# Altium PCB PCB_RB2_My.PcbDoc (part 1 of 2)
Units mm, origin at the board's own origin, x right, y up, seen from the top; angles counter-clockwise.
Board outline 198 x 170 mm, 2 copper layers (Top, Bottom); 107 components, 89 nets, 429 pads, 145 vias.
Unrouted connection lines stored in the file: 100.
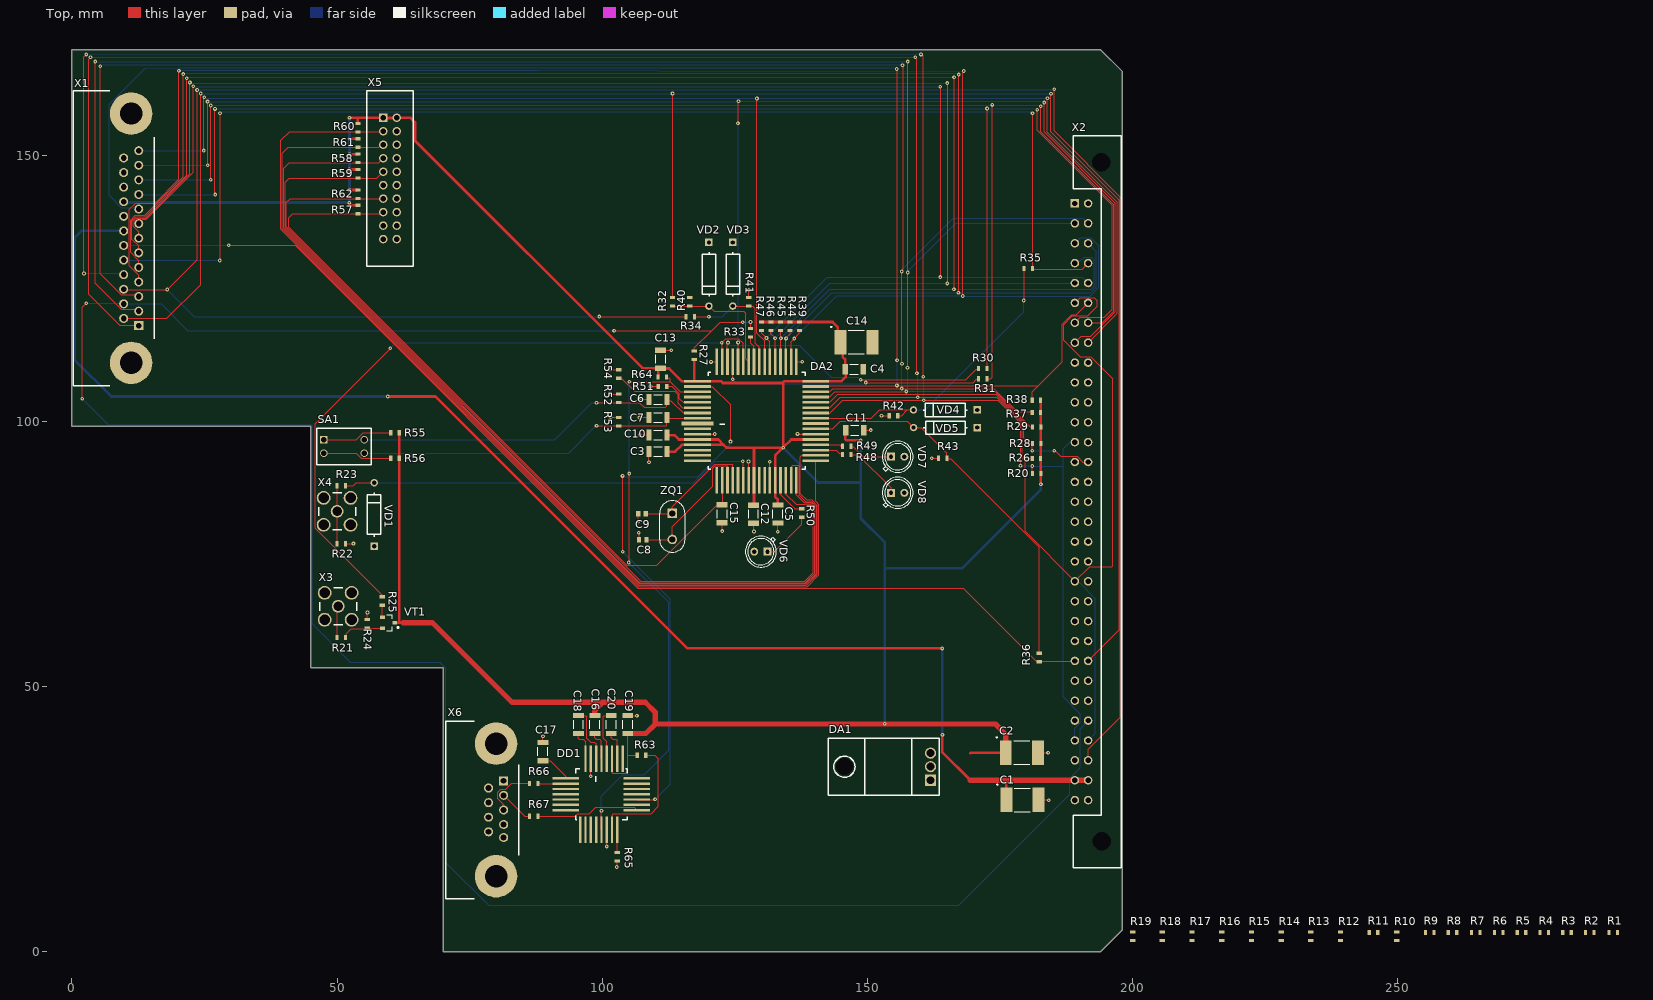
[diagram p0: Top view]
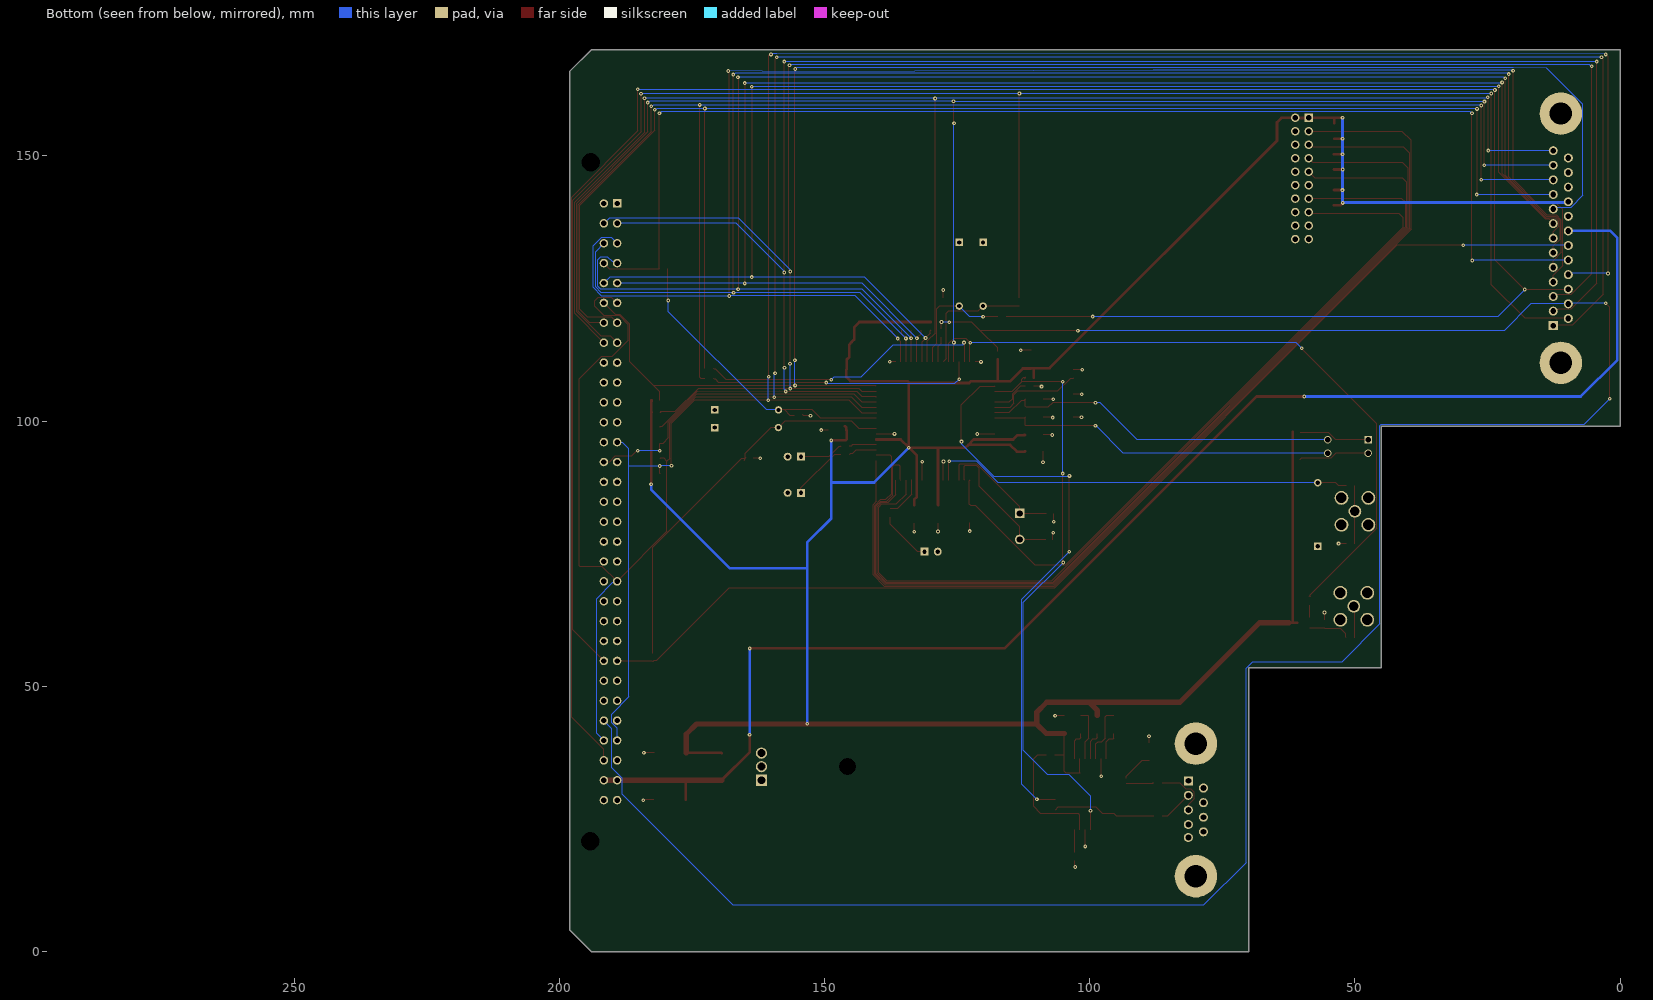
[diagram p1: Bottom view, seen from below]

## Layer stack, top to bottom
Top Solder: solder mask 0.0102, Solder Resist, Dk 3.5
Top: signal copper 0.0356
Dielectric 1: dielectric 0.32, FR-4, Dk 4.8
Bottom: signal copper 0.0356
Bottom Solder: solder mask 0.0102, Solder Resist, Dk 3.5

## Board outline
70,0 70,53.5 45,53.5 45,99 0,99 0,170 194,170 198,166 198,4 194,0

## Design rules (kind name [scope] priority, off if disabled: settings)
AcuteAngle [All] p1: minimum=3.50000000000000E+0001 checktracksonly=FALSE
BoardOutlineClearance "BoardOutlineClearance Fres ExtLayer" [OnTopLayer or OnBottomLayer] p1: gap=0.25 ignorepadtopadclearanceinfootprint=FALSE except(0: Arc-SplitContinuation Track-SplitContinuation SMDPad-SplitContinuation THPad-SplitContinuation Via-SplitContinuation Fill-SplitContinuation Poly-SplitContinuation Region-SplitContinuation Text-SplitContinuation) // Milling
BoardOutlineClearance "BoardOutlineClearance Fres IntLayer" [(OnMid        or OnMultiLayer) and not IsKeepOut] p2: gap=0.5 ignorepadtopadclearanceinfootprint=FALSE except(0: Arc-SplitContinuation Track-SplitContinuation SMDPad-SplitContinuation THPad-SplitContinuation Via-SplitContinuation Fill-SplitContinuation Poly-SplitContinuation Region-SplitContinuation Text-SplitContinuation) // Milling
Clearance "Clearance connector" [All vs HasFootprint('СНП347-20ВП22-В') and HasFootprint('СНП268-25РП32-1-4-В') and HasFootprint('СНП268-9ВП32-1-4-В') and HasFootprint('ГРПМ9-62ШУ2-В') and HasFootprint('HYR-1149') and HasFootprint('DS1040-02RN')] p1: gap=1.6 ignorepadtopadclearanceinfootprint=FALSE except(0: Arc-Arc Arc-Track Track-Track)
Clearance "Clearance Cap" [HasFootprint('CAPC3419X15N(1206)')] p2: gap=0 ignorepadtopadclearanceinfootprint=TRUE except(0.8: SMDPad-SMDPad)
Clearance "Clearance KeepOut" [IsKeepOut] p3: gap=0 ignorepadtopadclearanceinfootprint=TRUE // Standart
Clearance "Clearance Sdt Via" [(IsPad and not    InPadClass('ThermoPads')) or IsVia vs (IsPad and not    InPadClass('ThermoPads')) or IsVia] p4: gap=0 ignorepadtopadclearanceinfootprint=TRUE except(0.125: SMDPad-THPad SMDPad-Via THPad-THPad THPad-Via Via-Via) // Standart
Clearance "Clearance Sdt Via_Int" [OnMid vs isvia    or IsPad] p5: gap=0.25 ignorepadtopadclearanceinfootprint=TRUE // Standart
Clearance "Clearance Sdt" [All] p6: gap=0.125 ignorepadtopadclearanceinfootprint=TRUE except(0.2: Arc-Fill Arc-Poly Track-Fill Track-Poly SMDPad-SMDPad SMDPad-Fill SMDPad-Poly THPad-Fill THPad-Poly Via-Fill Via-Poly Fill-Fill Fill-Poly Poly-Poly Poly-Region Poly-Text; 0.25: Arc-Hole Track-Hole SMDPad-Hole THPad-Hole Via-Hole Fill-Hole Poly-Hole Region-Hole Text-Hole) // Standart
ComponentClearance ComponentClearance_TP [ParameterValue('ClassName')='TP'] p1: gap=-5 collisioncheckmode=3 verticalgap=0 showdistances=FALSE
ComponentClearance ComponentClearance_SMT [ParameterValue('ClassName')='SMT'] p2: gap=0.99 collisioncheckmode=3 verticalgap=0 showdistances=FALSE
ComponentClearance ComponentClearance_CHIP_L [ParameterValue('ClassName')='CHIP_L'] p3: gap=0.8 collisioncheckmode=3 verticalgap=0 showdistances=FALSE
ComponentClearance ComponentClearance_CHIP [ParameterValue('ClassName')='CHIP' vs ParameterValue('ClassName')<>'TH'] p4: gap=0.59 collisioncheckmode=3 verticalgap=0 showdistances=FALSE
DiffPairsRouting "DiffPairsRouting 1 Oz" [All] p1: maxlimit=0.5 minlimit=0.125 mostfreqgap=0.3 toplayer_minwidth=0.125 toplayer_maxwidth=0.5 toplayer_prefwidth=0.2 bottomlayer_minwidth=0.125 bottomlayer_maxwidth=0.5 bottomlayer_prefwidth=0.2 maxuncoupledlength=12.7
HoleSize "Minimum HoleSize" [IsPad] p1: absolutevalues=TRUE maxlimit=5.9 minlimit=0.6 maxpercent=80.000 minpercent=20.000
HoleSize "Minimum HoleSize VIA 1" [IsVia] p2: absolutevalues=TRUE maxlimit=5.9 minlimit=0.3 maxpercent=80.000 minpercent=20.000 // Standart
HoleSize "Minimum HoleSize VIA 2" [IsVia] p3: absolutevalues=TRUE maxlimit=5.9 minlimit=0.2 maxpercent=80.000 minpercent=20.000 // Advance
HoleToHoleClearance Hole2HoleClearance [All] p1: gap=0.25 allowstackedmicrovias=FALSE
MinimumAnnularRing "Minimum AR VIA Standart" [All] p1: minimumring=0.15
MinimumAnnularRing "Minimum AR PAD Standart" [All] p2: minimumring=0.2
MinimumSolderMaskSliver "SolderMask Bridge Standart" [All] p1: minsoldermaskwidth=0.15 // All Masks
PlaneClearance "PlaneClearance Std" [All] p1: clearance=0.2 // Standart
PlaneConnect "TermalConnect Std" [All] p1: pad.planeconnectstyle=Relief pad.reliefexpansion=0.2 pad.reliefentries=4 pad.reliefconductorwidth=0.3 pad.reliefairgap=0.2 via.planeconnectstyle=Direct via.reliefexpansion=0.2 via.reliefentries=4 via.reliefconductorwidth=0.2 via.reliefairgap=0.2 // Standart
PolygonConnect "PolygonConnect Direct" [InPadClass('DirectConnection')] p1: connectstyle=Direct reliefconductorwidth=0.15 reliefentries=4 polygonreliefangle="90 Angle" airgapwidth=0.2 // Standart
PolygonConnect "PolygonConnect Std_Int" [OnMid] p2: thpad.connectstyle=Relief thpad.reliefconductorwidth=0.2 thpad.reliefentries=4 thpad.polygonreliefangle="90 Angle" thpad.airgapwidth=0.25 smdpad.connectstyle=Relief smdpad.reliefconductorwidth=0.2 smdpad.reliefentries=4 smdpad.polygonreliefangle="90 Angle" smdpad.airgapwidth=0.2 via.connectstyle=Direct via.reliefconductorwidth=0.254 via.reliefentries=4 via.polygonreliefangle="90 Angle" via.airgapwidth=0.254 // Standart
PolygonConnect "PolygonConnect Std" [All] p3: thpad.connectstyle=Relief thpad.reliefconductorwidth=0.2 thpad.reliefentries=4 thpad.polygonreliefangle="90 Angle" thpad.airgapwidth=0.2 smdpad.connectstyle=Relief smdpad.reliefconductorwidth=0.2 smdpad.reliefentries=4 smdpad.polygonreliefangle="90 Angle" smdpad.airgapwidth=0.2 via.connectstyle=Direct via.reliefconductorwidth=0.254 via.reliefentries=4 via.polygonreliefangle="90 Angle" via.airgapwidth=0.254 // Standart
RoomDefinition RB2_My [InComponentClass('RB2_My')] p1: confinementstyle=ConfineIn formatcopy=TRUE lockcomponents=FALSE outline 199.1,1.4 292.099,1.4 292.099,7 199.1,7
RoutingCorners [All] p1 off: cornerstyle=45-Degree minsetback=2.54 maxsetback=2.54
RoutingVias [All] p1: holewidth=0.3 width=0.7 viastyle="Through Hole" minholewidth=0.3 minwidth=0.7 maxholewidth=0.6 maxwidth=1.1 viatemplateguid#1={5BCA8359-3FDF-4503-88DF-982B2CC54C6B} viatemplatename#1=v60h30m0mx0(Tol0-10)
SMDEntry [not InPadClass('ThermoPads')] p1: side=TRUE corner=TRUE anyangle=FALSE
SilkToSilkClearance Silk2SilkClearance [All] p1: silktosilkclearance=0.15
SilkToSolderMaskClearance Silk2SolderMaskClearance [IsPad] p1: minsilkscreentomaskgap=0.15 clearancetoexposedcopper=FALSE
SolderMaskExpansion "SolderMaskExpansion Std" [All] p1: expansion=0.05 istentingtop=FALSE // Standart
UnRoutedNet [All] p1: checkbadconnections=TRUE
Width "Width Std" [All] p1: maxlimit=10 minlimit=0.125 preferedwidth=0.2 checkconnectedcopper=TRUE // Standart
19 further rules are at their usual default settings.

## Classes and differential pairs
component class RB2_My: C1 C2 C3 C4 C5 C6 C7 C8 C9 C10 C11 C12 C13 C14 C16 C18 C20 DA1 DA2 DD1 R24 R26 R30 R32 R37 R39 R41 R42 R44 R48 R49 R50 R51 R52 R53 R54 R55 R56 R57 R58 R59 R60 R61 R62 R63 R64 R65 R66 R67 SA1 VD1 VD2 VD3 VD4 VD5 VD6 VD7 VD8 VT1 X1 X2 X3 X4 X5 X6 ZQ1

## Components (designator, comment, footprint, x,y, rotation, side; value= is the part's Value field where it differs from the comment)
C1 "К53-65-16В-100мкФАЖЯР.673546.004ТУ" Chip2PinSM127P600-8N(E) 179.2,28.6 r0 top value=100мк
C2 "К53-65-16В-100мкФАЖЯР.673546.004ТУ" Chip2PinSM127P600-8N(E) 179.1,37.5 r0 top value=100мк
C3 "К10-17в-Н90-0,1мкФ-3ОЖО.460.107ТУ" CAPC3419X15N(1206) 110.5,94.3 r180 top value=0,1мк
C4 "К10-17в-Н90-0,1мкФ-3ОЖО.460.107ТУ" CAPC3419X15N(1206) 147.5,109.8 r0 top value=0,1мк
C5 "К10-17в-Н90-0,1мкФ-3ОЖО.460.107ТУ" CAPC3419X15N(1206) 133.1,82.5 r270 top value=0,1мк
C6 "К10-17в-Н90-0,1мкФ-3ОЖО.460.107ТУ" CAPC3419X15N(1206) 110.5,104.1 r0 top value=0,1мк
C7 "К10-17в-Н90-0,1мкФ-3ОЖО.460.107ТУ" CAPC3419X15N(1206) 110.5,100.7 r0 top value=0,1мк
C8 "К10-17в-МПО-22Ф10%-1ОЖО.460.107ТУ" "CAPC1608X09N (0603)" 107.625,77.65 r180 top value=22
C9 "К10-17в-МПО-22Ф10%-1ОЖО.460.107ТУ" "CAPC1608X09N (0603)" 107.5,82.575 r180 top value=22
C10 "К10-17в-Н90-0,1мкФ-3ОЖО.460.107ТУ" CAPC3419X15N(1206) 110.5,97.4 r180 top value=0,1мк
C11 "К10-17в-Н90-0,1мкФ-3ОЖО.460.107ТУ" CAPC3419X15N(1206) 147.6,98.3 r0 top value=0,1мк
C12 "К10-17в-Н90-0,1мкФ-3ОЖО.460.107ТУ" CAPC3419X15N(1206) 128.525,82.475 r270 top value=0,1мк
C13 "К10-17в-Н90-0,1мкФ-3ОЖО.460.107ТУ" CAPC3419X15N(1206) 111,111.7 r90 top value=0,1мк
C14 "К53-65-16В-100мкФАЖЯР.673546.004ТУ" Chip2PinSM127P600-8N(E) 147.9,114.9 r0 top value=100мк
C15 "К10-17в-Н90-0,1мкФ-3ОЖО.460.107ТУ" CAPC3419X15N(1206) 122.601,82.541 r270 top value=0,1мк
C16 "К10-17в-Н30-0,22мкФ-3ОЖО.460.107ТУ" CAPC3419X15N(1206) 98.6,42.8 r90 top value=0,22мк
C17 "К10-17в-Н30-0,22мкФ-3ОЖО.460.107ТУ" CAPC3419X15N(1206) 88.8,37.7 r270 top value=0,22мк
C18 "К10-17в-Н30-0,22мкФ-3ОЖО.460.107ТУ" CAPC3419X15N(1206) 95.5,42.8 r270 top value=0,22мк
C19 "К10-17в-Н30-0,22мкФ-3ОЖО.460.107ТУ" CAPC3419X15N(1206) 104.8,42.8 r270 top value=0,22мк
C20 "К10-17в-Н30-0,22мкФ-3ОЖО.460.107ТУ" CAPC3419X15N(1206) 101.7,42.8 r270 top value=0,22мк
DA1 "1303ЕН3.3П" КТ-28А-2.01 169.4,32.3 r90 top
DA2 "1986ВЕ92У" 1986ВЕ92У 121.6,88.9 r0 top
DD1 "5559ИН4У" 5559ИН4У 98.8,36.3 r270 top
R1 "Р1-12-0,1-05%" "RESC1608X05N (0603)" 290.599,3.6 r0 top value=0
R2 "Р1-12-0,1-05%" "RESC1608X05N (0603)" 286.199,3.6 r0 top value=0
R3 "Р1-12-0,1-05%" "RESC1608X05N (0603)" 281.899,3.6 r0 top value=0
R4 "Р1-12-0,1-05%" "RESC1608X05N (0603)" 277.599,3.6 r0 top value=0
R5 "Р1-12-0,1-05%" "RESC1608X05N (0603)" 273.299,3.6 r0 top value=0
R6 "Р1-12-0,1-05%" "RESC1608X05N (0603)" 268.999,3.6 r0 top value=0
R7 "Р1-12-0,1-05%" "RESC1608X05N (0603)" 264.699,3.6 r0 top value=0
R8 "Р1-12-0,1-05%" "RESC1608X05N (0603)" 260.299,3.6 r0 top value=0
R9 "Р1-12-0,1-05%" "RESC1608X05N (0603)" 255.999,3.6 r0 top value=0
R10 "Р1-12-0,1-05%" "RESC1608X05N (0603)" 249.799,2.9 r90 top value=0
R11 "Р1-12-0,1-05%" "RESC1608X05N (0603)" 245.399,3.6 r0 top value=0
R12 "Р1-12-0,1-05%" "RESC1608X05N (0603)" 239.199,2.9 r90 top value=0
R13 "Р1-12-0,1-05%" "RESC1608X05N (0603)" 233.599,2.9 r90 top value=0
R14 "Р1-12-0,1-05%" "RESC1608X05N (0603)" 227.999,2.9 r90 top value=0
R15 "Р1-12-0,1-05%" "RESC1608X05N (0603)" 222.4,2.9 r90 top value=0
R16 "Р1-12-0,1-05%" "RESC1608X05N (0603)" 216.8,2.9 r90 top value=0
R17 "Р1-12-0,1-05%" "RESC1608X05N (0603)" 211.2,2.9 r90 top value=0
R18 "Р1-12-0,1-05%" "RESC1608X05N (0603)" 205.6,2.9 r90 top value=0
R19 "Р1-12-0,1-05%" "RESC1608X05N (0603)" 200,2.9 r90 top value=0
R20 "Р1-12-0,125-10кОм5%" "RESC1608X05N (0603)" 181.9,90.125 r0 top value=10к
R21 "Р1-12-0,1-05%" "RESC1608X05N (0603)" 50.8,59.2 r0 top value=0
R22 "Р1-12-0,1-505%" "RESC1608X05N (0603)" 50.8,76.9 r180 top value=50
R23 "Р1-12-0,125-1к5%" "RESC1608X05N (0603)" 50.8,87.8 r0 top value=1к
R24 "Р1-12-0,125-560Ом5%" "RESC1608X05N (0603)" 55.7,61.8 r270 top value=560
R25 "Р1-12-0,125-560Ом5%" "RESC1608X05N (0603)" 58.5,66.1 r270 top value=560
R26 "Р1-12-0,125-10кОм5%" "RESC1608X05N (0603)" 181.85,92.95 r0 top value=10к
R27 "Р1-12-0,1-0,155%" "RESC1608X05N (0603)" 117.325,112.425 r270 top value=0,15
R28 "Р1-12-0,125-10кОм5%" "RESC1608X05N (0603)" 181.9,95.775 r0 top value=10к
R29 "Р1-12-0,125-10кОм5%" "RESC1608X05N (0603)" 181.9,98.9 r0 top value=10к
R30 "Р1-12-0,1-0,155%" "RESC1608X05N (0603)" 171.75,109.925 r180 top value=0,15
R31 "Р1-12-0,1-0,155%" "RESC1608X05N (0603)" 171.75,107.975 r180 top value=0,15
R32 "Р1-12-0,1-1,8кОм5%" "RESC1608X05N (0603)" 113.25,122.5 r270 top value=1,8к
R33 "Р1-12-0,1-0,155%" "RESC1608X05N (0603)" 127.95,116.65 r270 top value=0,15
R34 "Р1-12-0,1-1кОм5%" "RESC1608X05N (0603)" 116.575,119.7 r0 top value=1к
R35 "Р1-12-0,1-1,8кОм5%" "RESC1608X05N (0603)" 180.325,128.775 r180 top value=1,8к
R36 "Р1-12-0,1-1,8кОм5%" "RESC1608X05N (0603)" 182.375,55.45 r90 top value=1,8к
R37 "Р1-12-0,125-10кОм5%" "RESC1608X05N (0603)" 181.85,101.625 r0 top value=10к
R38 "Р1-12-0,125-10кОм5%" "RESC1608X05N (0603)" 181.85,103.95 r0 top value=10к
R39 "Р1-12-0,125-10кОм5%" "RESC1608X05N (0603)" 137.2,117.9 r90 top value=10к
R40 "Р1-12-0,125-2705%" "RESC1608X05N (0603)" 116.5,122.5 r90 top value=270
R41 "Р1-12-0,125-2705%" "RESC1608X05N (0603)" 127.6,122.5 r90 top value=270
R42 "Р1-12-0,125-2705%" "RESC1608X05N (0603)" 154.9,101.05 r180 top value=270
R43 "Р1-12-0,125-2705%" "RESC1608X05N (0603)" 164.2,93 r180 top value=270
R44 "Р1-12-0,125-10кОм5%" "RESC1608X05N (0603)" 135.4,117.9 r90 top value=10к
R45 "Р1-12-0,125-10кОм5%" "RESC1608X05N (0603)" 133.6,117.9 r90 top value=10к
R46 "Р1-12-0,125-10кОм5%" "RESC1608X05N (0603)" 131.8,117.9 r90 top value=10к
R47 "Р1-12-0,125-10кОм5%" "RESC1608X05N (0603)" 130,117.9 r90 top value=10к
R48 "Р1-12-0,125-1к5%" "RESC1608X05N (0603)" 146.1,93.7 r0 top value=1к
R49 "Р1-12-0,125-1к5%" "RESC1608X05N (0603)" 146.1,95.3 r0 top value=1к
R50 "Р1-12-0,125-1к5%" "RESC1608X05N (0603)" 137.6,82.7 r270 top value=1к
R51 "Р1-12-0,125-0,155%" "RESC1608X05N (0603)" 111.35,106.55 r0 top value=0,15
R52 "Р1-12-0,125-10кОм5%" "RESC1608X05N (0603)" 103.1,104.3 r270 top value=10к
R53 "Р1-12-0,125-10кОм5%" "RESC1608X05N (0603)" 103.1,99.9 r270 top value=10к
R54 "Р1-12-0,125-10кОм5%" "RESC1608X05N (0603)" 103.1,108.9 r90 top value=10к
R55 "Р1-12-0,125-10кОм5%" "RESC1608X05N (0603)" 60.9,97.8 r0 top value=10к
R56 "Р1-12-0,125-10кОм5%" "RESC1608X05N (0603)" 60.9,93 r0 top value=10к
R57 "Р1-12-0,125-10кОм5%" "RESC1608X05N (0603)" 53.95,139.9 r270 top value=10к
R58 "Р1-12-0,125-10кОм5%" "RESC1608X05N (0603)" 53.95,149.55 r270 top value=10к
R59 "Р1-12-0,125-10кОм5%" "RESC1608X05N (0603)" 53.95,146.65 r270 top value=10к
R60 "Р1-12-0,125-10кОм5%" "RESC1608X05N (0603)" 53.925,155.35 r270 top value=10к
R61 "Р1-12-0,125-10кОм5%" "RESC1608X05N (0603)" 53.925,152.45 r270 top value=10к
R62 "Р1-12-0,125-10кОм5%" "RESC1608X05N (0603)" 53.95,142.775 r270 top value=10к
R63 "Р1-12-0,125-10кОм5%" "RESC1608X05N (0603)" 107.4,37 r0 top value=10к
R64 "Р1-12-0,125-10кОм5%" "RESC1608X05N (0603)" 111.325,108.325 r180 top value=10к
R65 "Р1-12-0,1-0,155%" "RESC1608X05N (0603)" 102.8,17.9 r90 top value=0,15
R66 "Р1-12-0,1-0,155%" "RESC1608X05N (0603)" 87.1,31.7 r180 top value=0,15
R67 "Р1-12-0,1-0,155%" "RESC1608X05N (0603)" 87.1,25.5 r180 top value=0,15
SA1 "DS1040-02RN" DS1040-02RN 47.5,96.5 r270 top
VD1 "2С133аА0.339.092ТУ" 2С127Д-1 57,76.4 r90 top
VD2 "2С133аА0.339.092ТУ" 2С127Д-1 120.1,133.7 r270 top
VD3 "2С133аА0.339.092ТУ" 2С127Д-1 124.6,133.7 r270 top
VD4 "2С133аА0.339.092ТУ" 2С127Д-1 170.675,102.125 r180 top
VD5 "2С133аА0.339.092ТУ" 2С127Д-1 170.7,98.8 r180 top
VD6 "3Л341БаА0.339.189ТУ" 3Л341Б 129.9,75.4 r180 top
VD7 "3Л341БаА0.339.189ТУ" 3Л341Б 155.7,93.3 r0 top
VD8 "3Л341БаА0.339.189ТУ" 3Л341Б 155.7,86.5 r0 top
VT1 "2Т368А9аА0.339.092ТУ" "SOT100P230X95-3N (2T368A9)" 59.7,62 r0 top
X1 "СНП268-25РП32-1-3-В" СНП268-25РП32-1-4-В 12.6,118 r270 top
X2 "ГРПМ9-62ШУ2-В" ГРПМ9-62ШУ2-В 188.8,153.8 r90 top
X3 "HYR-1149" HYR-1149 50.2,65.1 r0 top
X4 "HYR-1149" HYR-1149 50,83 r0 top
X5 "СНП347-20ВП32-В" СНП347-20ВП22-В 58.7,157.2 r270 top
X6 "СНП268-9ВП32-1-3-В" СНП268-9ВП32-1-4-В 81.4,32.2 r270 top
ZQ1 "РК386-П-8ДТ-8000КТУ6321-004-07614320-96" РК456 113.2,82.6 r270 top value=8М

## Footprints (in the part's own frame and the unit in brackets; to place one, negate y for a bottom-side part, rotate by r counter-clockwise, add the part's x,y. Pads: shape width x height; smd on the part's side, far side on the other; paste and mask are expansions set on the pad)
2С127Д-1 [mm]
  rect 1.4x1.4 hole 0.8: 1(0,0)
  round 1.4 hole 0.8: 2(12,0)
  silkscreen extent 1.85,-1.23 10.15,1.27
3Л341Б [mm]
  rect 1.5x1.5 hole 0.8: 1(-1.25,0)
  round 1.5 hole 0.8: 2(1.25,0)
  silkscreen extent -2.92,-2.92 2.92,2.92
1986ВЕ92У [mm]
  rect 6x0.7 smd: 1(-3.65,10.65)
  rect 5x0.5 smd: 2(-3.65,9.65) 3(-3.65,8.65) 4(-3.65,7.65) 5(-3.65,6.65) 6(-3.65,5.65) 7(-3.65,4.65) 8(-3.65,3.65) 25(18.65,3.65) 26(18.65,4.65) 27(18.65,5.65) 28(18.65,6.65) 29(18.65,7.65) 30(18.65,8.65) 31(18.65,9.65) 32(18.65,10.65) 33(18.65,11.65) 34(18.65,12.65) 35(18.65,13.65) 36(18.65,14.65) 37(18.65,15.65) 38(18.65,16.65) 39(18.65,17.65) 40(18.65,18.65) 57(-3.65,18.65) 58(-3.65,17.65) 59(-3.65,16.65) 60(-3.65,15.65) 61(-3.65,14.65) 62(-3.65,13.65) 63(-3.65,12.65) 64(-3.65,11.65)
  rect 0.5x5 smd: 9(0,0) 10(1,0) 11(2,0) 12(3,0) 13(4,0) 14(5,0) 15(6,0) 16(7,0) 17(8,0) 18(9,0) 19(10,0) 20(11,0) 21(12,0) 22(13,0) 23(14,0) 24(15,0) 41(15,22.3) 42(14,22.3) 43(13,22.3) 44(12,22.3) 45(11,22.3) 46(10,22.3) 47(9,22.3) 48(8,22.3) 49(7,22.3) 50(6,22.3) 51(5,22.3) 52(4,22.3) 53(3,22.3) 54(2,22.3) 55(1,22.3) 56(0,22.3)
  silkscreen extent -1.65,2 16.65,20.3
5559ИН4У [mm]
  rect 5x0.45 smd: 1(-0.05,0.04) 2(-0.05,-0.96) 3(-0.05,-1.96) 11(13.33,-1.96) 12(13.33,-0.96) 13(13.33,0.04) 14(13.33,1.04) 15(13.33,2.04) 16(13.33,3.04) 17(13.33,4.04) 25(-0.05,4.04) 26(-0.05,3.04) 27(-0.05,2.04) 28(-0.05,1.04) 29(-0.05,5.04) 30(13.33,-2.96)
  rect 0.45x5 smd: 4(3.64,-5.65) 5(4.64,-5.65) 6(5.64,-5.65) 7(6.64,-5.65) 8(7.64,-5.65) 9(8.64,-5.65) 10(9.64,-5.65) 18(9.64,7.73) 19(8.64,7.73) 20(7.64,7.73) 21(6.64,7.73) 22(5.64,7.73) 23(4.64,7.73) 24(3.64,7.73)
  silkscreen extent 1.8,-3.8 11.48,5.87
"CAPC1608X09N (0603)" [mm] "Chip Capacitor, 2-Leads, Body 1.60x0.80mm, IPC Medium Density"
  rect 0.8x1 smd: 1(-0.7,0) 2(0.7,0)
  body extent -0.85,-0.45 0.85,0.45, height 0.9
CAPC3419X15N(1206) [mm] "Chip Capacitor, 2-Leads, Body 3,35x1,90mm, IPC Medium Density"
  rect 1x2.05 smd: 1(-1.7,0) 2(1.7,0)
  silkscreen extent -0.8,-0.93 0.8,0.92, body extent -1.85,-1 1.85,1, height 1.5
Chip2PinSM127P600-8N(E) [mm]
  rect 2.25x4.6 smd: 1(-3.025,0) 2(3.025,0)
  silkscreen extent -4.77,-2.2 1.5,2.92, body extent -3.8,-2.3 3.8,2.3, height 4.1
DS1040-02RN [mm]
  rect 1.4x1.4 hole 1: 1(0,0)
  round 1.4 hole 1: 2(0,7.62) 3(2.54,0) 4(2.54,7.62)
  silkscreen extent -2.2,-1.3 4.7,8.9, body extent -2,-1.14 4.54,8.76, height 6.8
HYR-1149 [mm]
  round 2.4 hole 1.8: 1(0,0)
  round 2.6 hole 2: 2(2.54,-2.54) 3(2.54,2.54) 4(-2.54,2.54) 5(-2.54,-2.54)
  silkscreen extent -3.5,-3.5 3.5,3.5
"RESC1608X05N (0603)" [mm] "Chip Resistor, 2-Leads, Body 1.60x0.85mm, IPC Medium Density"
  rect 0.6x1 smd: 1(-0.8,0) 2(0.8,0)
  body extent -0.85,-0.48 0.85,0.48, height 0.45
"SOT100P230X95-3N (2T368A9)" [mm] "SOT23, 3-Leads, Body 2,85x2,30mm, Pitch 1,00mm, IPC Medium Density"
  rect 0.9x0.65 smd: 1(1.15,0) 2(-1.15,1) 3(-1.15,-1)
  silkscreen extent -0.3,-1.55 1.94,1.55, body extent -0.7,-1.52 0.7,1.53, height 0.95
ГРПМ9-62ШУ2-В [mm]
  round 3.2 hole 3.5: 1(-133,-5.35) 2(-5,-5.3)
  rect 1.6x1.6 hole 1: 1A(-12.75,-0.3)
  round 1.6 hole 1: 1B(-12.75,-2.8) 2A(-16.5,-0.3) 2B(-16.5,-2.8) 3A(-20.25,-0.3) 3B(-20.25,-2.8) 4A(-24,-0.3) 4B(-24,-2.8) 5A(-27.75,-0.3) 5B(-27.75,-2.8) 6A(-31.5,-0.3) 6B(-31.5,-2.8) 7A(-35.25,-0.3) 7B(-35.25,-2.8) 8A(-39,-0.3) 8B(-39,-2.8) 9A(-42.75,-0.3) 9B(-42.75,-2.8) 10A(-46.5,-0.3) 10B(-46.5,-2.8) 11A(-50.25,-0.3) 11B(-50.25,-2.8) 12A(-54,-0.3) 12B(-54,-2.8) 13A(-57.75,-0.3) 13B(-57.75,-2.8) 14A(-61.5,-0.3) 14B(-61.5,-2.8) 15A(-65.25,-0.3) 15B(-65.25,-2.8) 16A(-69,-0.3) 16B(-69,-2.8) 17A(-72.75,-0.3) 17B(-72.75,-2.8) 18A(-76.5,-0.3) 18B(-76.5,-2.8) 19A(-80.25,-0.3) 19B(-80.25,-2.8) 20A(-84,-0.3) 20B(-84,-2.8) 21A(-87.75,-0.3) 21B(-87.75,-2.8) 22A(-91.5,-0.3) 22B(-91.5,-2.8) 23A(-95.25,-0.3) 23B(-95.25,-2.8) 24A(-99,-0.3) 24B(-99,-2.8) 25A(-102.75,-0.3) 25B(-102.75,-2.8) 26A(-106.5,-0.3) 26B(-106.5,-2.8) 27A(-110.25,-0.3) 27B(-110.25,-2.8) 28A(-114,-0.3) 28B(-114,-2.8) 29A(-117.75,-0.3) 29B(-117.75,-2.8) 30A(-121.5,-0.3) 30B(-121.5,-2.8) 31A(-125.25,-0.3) 31B(-125.25,-2.8)
  silkscreen extent -138,-9 0,0
КТ-28А-2.01 [mm]
  rect 2.1x2.1 hole 1.5: 1(0,7.5)
  round 2.1 hole 1.5: 2(2.55,7.5) 3(5.1,7.5)
  round 2 hole 3.2: 4(2.55,23.75)
  silkscreen extent -2.95,5.85 7.95,26.8, body extent -2.53,7.21 7.63,26.7, height 4.2
РК456 [mm]
  rect 1.8x1.8 hole 1.2: 1(0,0)
  round 1.8 hole 1.2: 2(4.9,0)
  silkscreen extent -2.4,-2.4 7.3,2.4
СНП268-9ВП32-1-4-В [mm]
  rect 1.7x1.7 hole 1.1: 1(0,0)
  round 1.7 hole 1.1: 2(2.75,0) 3(5.5,0) 4(8.25,0) 5(10.7,0) 6(1.375,-2.84) 7(4.125,-2.84) 8(6.875,-2.84) 9(9.625,-2.84)
  round 8 hole 4.2: 10(-7,-1.42) 11(18,-1.42)
  silkscreen extent -11.25,-10.94 22.25,2.83
СНП268-25РП32-1-4-В [mm]
  rect 1.7x1.7 hole 1.1: 1(0,0)
  round 1.7 hole 1.1: 2(-2.75,0) 3(-5.5,0) 4(-8.25,0) 5(-11,0) 6(-13.75,0) 7(-16.5,0) 8(-19.25,0) 9(-22,0) 10(-24.75,0) 11(-27.5,0) 12(-30.25,0) 13(-33,0) 14(-1.375,-2.84) 15(-4.125,-2.84) 16(-6.875,-2.84) 17(-9.625,-2.84) 18(-12.375,-2.84) 19(-15.125,-2.84) 20(-17.875,-2.84) 21(-20.625,-2.84) 22(-23.375,-2.84) 23(-26.125,-2.84) 24(-28.875,-2.84) 25(-31.625,-2.84)
  round 8 hole 4.2: 26(7,-1.42) 27(-40,-1.42)
  silkscreen extent -44.3,-12.34 11.3,2.9
СНП347-20ВП22-В [mm]
  rect 1.6x1.6 hole 1.02: 1(0,0)
  round 1.6 hole 1.02: 2(0,2.54) 3(2.54,0) 4(2.54,2.54) 5(5.08,0) 6(5.08,2.54) 7(7.62,0) 8(7.62,2.54) 9(10.16,0) 10(10.16,2.54) 11(12.7,0) 12(12.7,2.54) 13(15.24,0) 14(15.24,2.54) 15(17.78,0) 16(17.78,2.54) 17(20.32,0) 18(20.32,2.54) 19(22.86,0) 20(22.86,2.54)
  silkscreen extent -5.12,-3.08 27.98,5.62

## Part data
C1 C2 C14: library part CapTan, "Танталовый конденсатор", manufacture=АЖЯР.673546.004ТУ, Footpr="\"E\"", Name="Танталовый конденсатор", name_main=К53-65-16В-, Units=Ф
C3 C4 C5 C6 C7 C10 C11 C12 C13 C15: library part CapCer, "Керамический конденсатор", manufacture=ОЖО.460.107ТУ, Footpr=1206, Name="Керамический конденсатор", name_main=К10-17в-Н90-, nameSuf=-3, Units=Ф
C8 C9: library part CapCer_2, "Керамический конденсатор", manufacture=ОЖО.460.107ТУ, Tolerance=10%, Footpr=0603, Name="Керамический конденсатор", name_main=К10-17в-МПО-, nameSuf=-1, Units=Ф
C16 C17 C18 C19 C20: library part CapCer_1, "Керамический конденсатор", manufacture=ОЖО.460.107ТУ, Footpr=1206, Name="Керамический конденсатор", name_main=К10-17в-Н30-, nameSuf=-3, Units=Ф
DA1: library part Stabil, manufacture=АЕЯР.431420.638ТУ, Name=Микросхема, name_main=1303ЕН3.3П
DA2: library part 1986ВЕ93, "Микроконтроллер", manufacture=АЕЯР.431290.711ТУ, Name=Микросхема, name_main=1986ВЕ92У
DD1: "Приемопередатчик RS232", manufacture=АЕЯР.431230.460ТУ, Name=Микросхема, name_main=5559ИН4У
R1 R2 R3 R4 R5 R6 R7 R8 R9 R10 R11 R12 R13 R14 R15 R16 R17 R18 R19 R21: library part Res_1, "Резистор", Manufacturer=АЛЯР.434110.005ТУ, Tolerance=5%, Name=Резистор, name_main=Р1-12-0,1-
R20 R26 R28 R29 R37 R38 R39 R44 R45 R46 R47 R52 R53 R54 R55 R56 R57 R58 R59 R60 R61 R62 R63 R64: library part Res_7, "Резистор", Manufacturer=АЛЯР.434110.005ТУ, Tolerance=5%, Name=Резистор, name_main=Р1-12-0,125-, Units=Ом
R22: library part Res, "Резистор", Manufacturer=АЛЯР.434110.005ТУ, Tolerance=5%, Name=Резистор, name_main=Р1-12-0,1-
R23 R48 R49 R50: library part Res_8, "Резистор", Manufacturer=АЛЯР.434110.005ТУ, Tolerance=5%, Name=Резистор, name_main=Р1-12-0,125-
R24 R25: library part Res_3, "Резистор", Manufacturer=АЛЯР.434110.005ТУ, Tolerance=5%, Name=Резистор, name_main=Р1-12-0,125-, Units=Ом
R27 R30 R31 R33 R51 R65 R66 R67: library part Res_4, "Резистор", Manufacturer=АЛЯР.434110.005ТУ, Tolerance=5%, Name=Резистор
  R27 R30 R31 R33 R65 R66 R67: name_main=Р1-12-0,1-
  R51: name_main=Р1-12-0,125-
R32 R35 R36: library part Res_5, "Резистор", Manufacturer=АЛЯР.434110.005ТУ, Tolerance=5%, Name=Резистор, name_main=Р1-12-0,1-, Units=Ом
R34: library part Res_2, "Резистор", Manufacturer=АЛЯР.434110.005ТУ, Tolerance=5%, Name=Резистор, name_main=Р1-12-0,1-, Units=Ом
R40 R41 R42 R43: library part Res_6, "Резистор", Manufacturer=АЛЯР.434110.005ТУ, Tolerance=5%, Name=Резистор, name_main=Р1-12-0,125-
SA1: library part Switch, "Переключатель", Name=Переключатель, name_main=DS1040-02RN
VD1 VD2 VD3 VD4 VD5: library part 2С127Д-1, manufacture=аА0.339.092ТУ, Name=Стабилитрон, name_main=2С133
VD6 VD7 VD8: library part Led, "Индикатор", manufacture=аА0.339.189ТУ, Name=Индикатор, name_main=3Л341Б
VT1: library part 2Т368А, "NPN транзистор", manufacture=аА0.339.092ТУ, Name=Транзистор, name_main=2Т368А9
X1: library part СНП268-25РП, manufacture=БСАР.430420.014ТУ, Name=Разъемы, name_main=СНП268-25РП32-1-3-В
X2: library part GRPM9-62, manufacture=Ке0.364.009ТУ, Name=Разъемы, name_main=ГРПМ9-62ШУ2-В
X3 X4: library part SMA, manufacture=Чип&Дип, Name=Разъемы, name_main=HYR-1149
X5: library part СНП347-20ВП, manufacture=РЮМК.430420.012ТУ, Name=Разъемы, name_main=СНП347-20ВП32-В
X6: library part СНП268-9ВП, manufacture=БСАР.430420.014ТУ, Name=Разъемы, name_main=СНП268-9ВП32-1-3-В
ZQ1: library part XTAL, "Кварцевый резонатор", manufacture=ТУ6321-004-07614320-96, Name="Кварцевый резонатор", name_main=РК386-П-8ДТ-8000К, Units=Гц

## Via types
v1: diameter 0.7, hole 0.3, Top to Bottom, 145 vias

## Nets (pads, with @x,y where several pads share a name; then routed paths per layer and width w, separated by ;. In a path a pad name is that pad's centre, name@x,y a point inside that pad or via, vN(x,y) a via of type N, cw(c..) or ccw(c..) an arc to the next point about the centre after c; other vN are vias at no path point)
+3,3В: C2.1 C3.1 C4.1 C5.1 C10.1 C11.1 C12.1 C13.1 C14.1 C16.2 C19.2 DA1.3 DA2.4 DA2.5 DA2.16 DA2.20 DA2.29 DA2.40 DA2.57 DD1.26 R20.2 R26.2 R27.2 R28.2 R29.2 R37.2 R38.2 R39.2 R44.2 R45.2 R46.2 R47.2 R55.2 R56.2 R57.1 R58.1 R59.1 R60.1 R61.1 R62.1 R63.1 R64.2 VT1.1 X1.21 X5.1 X5.2 | length 617.3
  Top w0.125: DD1.26@101.84,36.35 101.84,33.673 101.913,33.6 104.4,33.6 104.8,34 104.8,37 ; C19.2@104.8,41.1 104.8,37 ; R63.1@106.6,37 104.8,37
  Top w0.5: v1(52.3,141.15) 52.75,140.7 R57.1@53.95,140.7 ; v1(52.3,147.45) R59.1@53.95,147.45 R59.1@53.9,147.5 ; v1(52.325,150.35) R58.1@53.95,150.35 ; v1(52.325,153.275) 52.35,153.25 R61.1@53.925,153.25 ; v1(52.325,157.2) 53.9,157.2 ; v1(52.35,143.575) R62.1@53.95,143.575 ; R60.1@53.925,156.15 53.925,157.175 53.9,157.2 ; VT1.1@60.85,62 61.7,62 ; R55.2@61.7,97.975 R56.2@61.7,93 61.7,62 ; 62.45,62 61.7,62 ; C16.2@98.557,44.543 C16.2@98.6,44.5 ; R64.2@110.543,108.243 110.543,109.75 C13.1@110.793,110 ; C3.1@112.2,94.3 112.25,94.25 113.725,94.25 115.025,95.55 DA2.5@117.95,95.55 122.875,95.55 ; C10.1@112.2,97.4 112.4,97.4 112.45,97.35 113.625,97.35 114.425,96.55 DA2.4@117.95,96.55 121.875,96.55 122.875,95.55 ; R27.2@117.325,111.625 DA2.57@117.325,107.55 ; C12.1@128.525,84.175 128.6,84.25 DA2.16@128.6,88.9 128.6,94.975 128.575,95 ; R47.2@130,118.7 143.425,118.7 144.418,117.707 144.418,115.357 C14.1@144.875,114.9 145.332,114.443 145.332,112.143 145.8,111.675 C4.1@145.8,109.8 145.9,109.7 145.9,108.318 145.132,107.55 DA2.40@140.25,107.55 134.393,107.55 134.1,107.257 v1(134.1,95) ; C5.1@133.1,84.2 133.1,85.2 132.6,85.7 DA2.20@132.6,88.9 132.6,93.5 v1(134.1,95) ; 134.1,107.2 122.725,107.2 122.375,107.55 DA2.57@117.325,107.55 ; DA2.29@140.25,96.55 135.65,96.55 v1(134.1,95) ; C11.1@146.15,99.075 145.9,98.825 C11.1@145.9,98.3 145.8,98.2 145.8,96.668 146.093,96.375 v1(148.75,96.375) ; 169.4,37.4 169.5,37.5 C2.1@176.075,37.5 ; R38.2@182.62,103.945 182.62,103.755 182.695,103.68 182.695,102.216 182.675,102.196 182.675,101.75 R37.2@182.625,101.7 ; v1(182.7,88.1) R28.2@182.7,95.775 R29.2@182.7,98.9 R37.2@182.7,101.675 ; 53.9,157.2 X5.1@58.7,157.2 58.75,157.15 61.19,157.15 X5.2@61.24,157.2 63.85,157.2 64.7,156.35 64.7,152.875 107.575,110 C13.1@110.793,110 ; C13.1@110.793,110 C13.1@111,110 111.075,109.925 112.6,109.925 114.975,107.55 DA2.57@117.325,107.55 ; 122.875,95.55 123.425,95 128.575,95 ; 128.575,95 v1(134.1,95)
  Top w1: 62.45,62 68,62 83,47 100.1,47 ; C16.2@98.557,44.543 98.557,45.457 100.1,47 ; C19.2@104.8,41.1 108.2,41.1 110,42.9 ; v1@153.25,42.9 110,42.9 ; v1@153.275,42.9 174.15,42.9 176.075,40.975 C2.1@176.075,37.5 ; 100.1,47 108.1,47 110,45.1 110,42.9
  Bottom w0.5: 9.76,141.375 9.91,141.225 52.084,141.225 52.12,141.188 52.262,141.188 v1(52.3,141.15) 52.325,141.175 v1(52.325,150.35) v1(52.325,153.275) v1(52.325,157.2) ; v1(134.1,95) 140.65,88.45 148.7,88.45 ; v1(148.75,96.375) 148.75,96.321 148.7,96.271 148.7,88.45 ; v1(153.25,42.925) 153.275,42.95 153.275,72.3 ; v1(182.7,88.1) 182.7,87.125 167.875,72.3 153.275,72.3 ; 148.7,88.45 148.7,81.7 153.275,77.125 153.275,72.3
+5В: C1.1 DA1.1 X2.30A X2.30B | length 271.8
  Top w0.5: v1(59.55,104.65) 68.55,104.65 116.041,57.159 v1(164.08,57.159) ; v1(164.125,40.9) 164.125,37.575 169.4,32.3 ; C1.1@176.175,28.6 176.175,32.3
  Top w1: 169.4,32.3 176.175,32.3 X2.30A@189.1,32.3 X2.30B@191.6,32.3
  Bottom w0.5: 9.76,135.875 1.825,135.875 0.525,134.575 0.525,111.55 7.425,104.65 v1(59.55,104.65) ; v1(164.08,57.159) 164.08,57.105 164.125,57.06 v1(164.125,40.9)
"+27В 2мкс": R12.2 R32.1 X2.24B | length 366.7
  Top w0.125: 9.76,119.375 17.9,119.375 24.275,125.75 v1(24.275,161.775) ; R32.1@113.25,123.3 v1(113.25,161.775) ; v1(184.6,161.75) 184.525,161.675 184.525,154.525 197.438,141.612 197.438,60.638 X2.24B@191.6,54.8
  Bottom w0.125: v1(24.275,161.775) v1(113.25,161.775) 184.575,161.775 v1(184.6,161.75)